# Altium PCB PCB4.PcbDoc
Units mil, origin at the board's own origin, x right, y up, seen from the top; angles counter-clockwise.
Board outline 1415 x 2590 mil, 2 copper layers (Top Layer, Bottom Layer); 19 components, 11 nets, 40 pads, 0 vias.
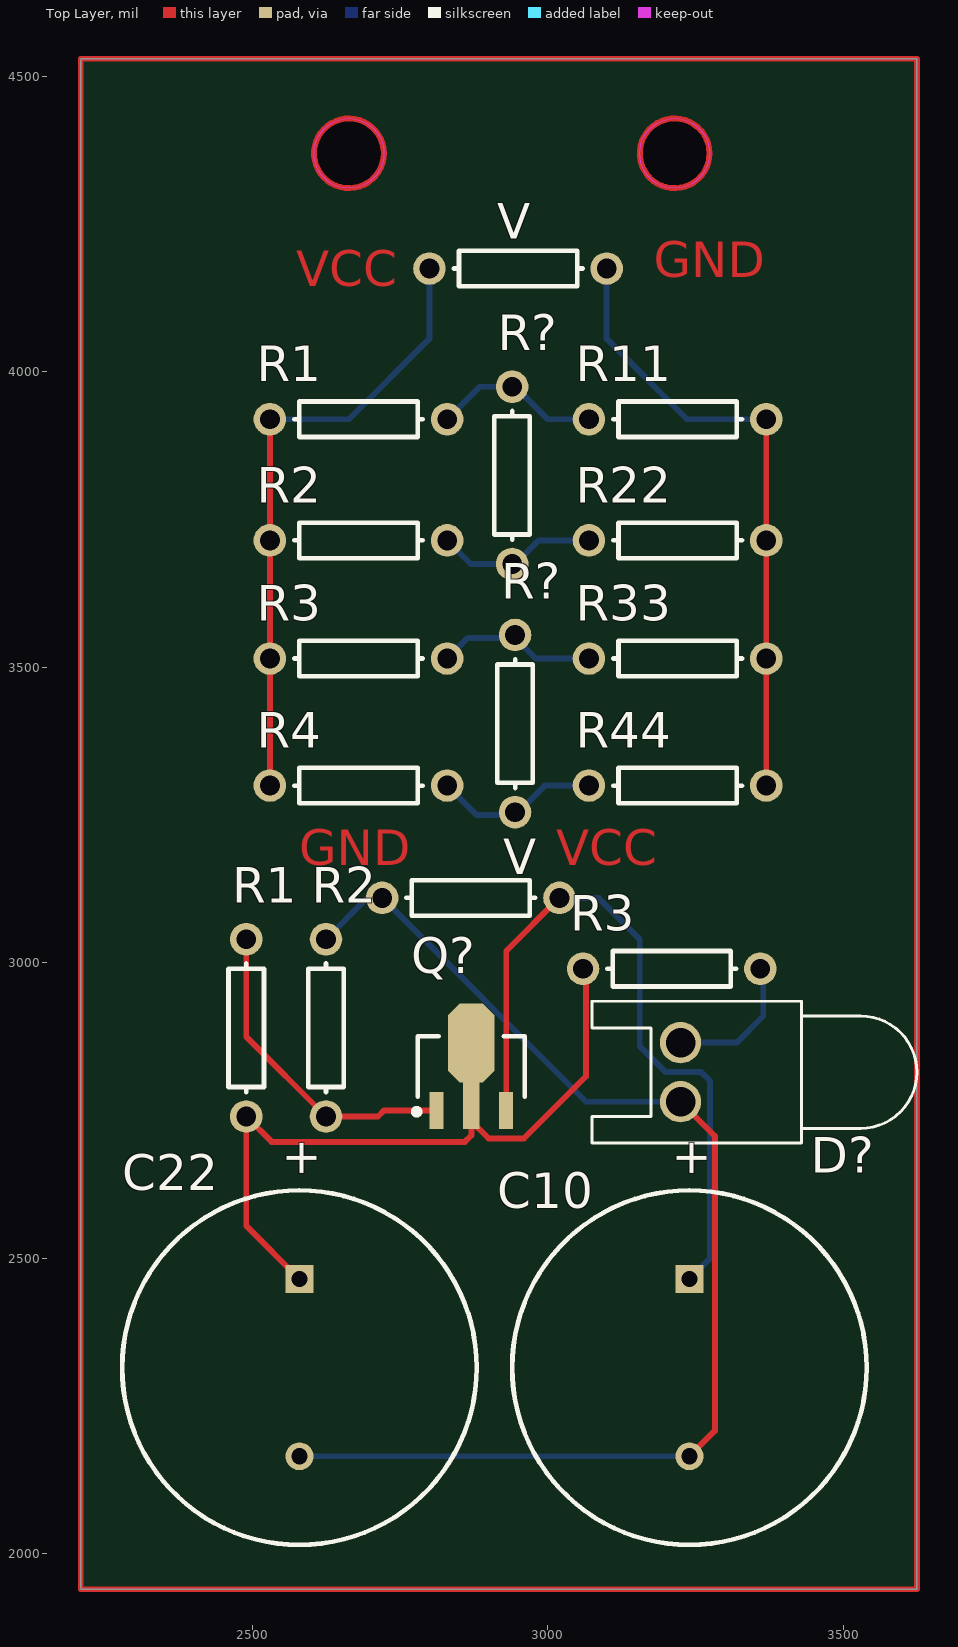
[diagram p0: Top Layer view]
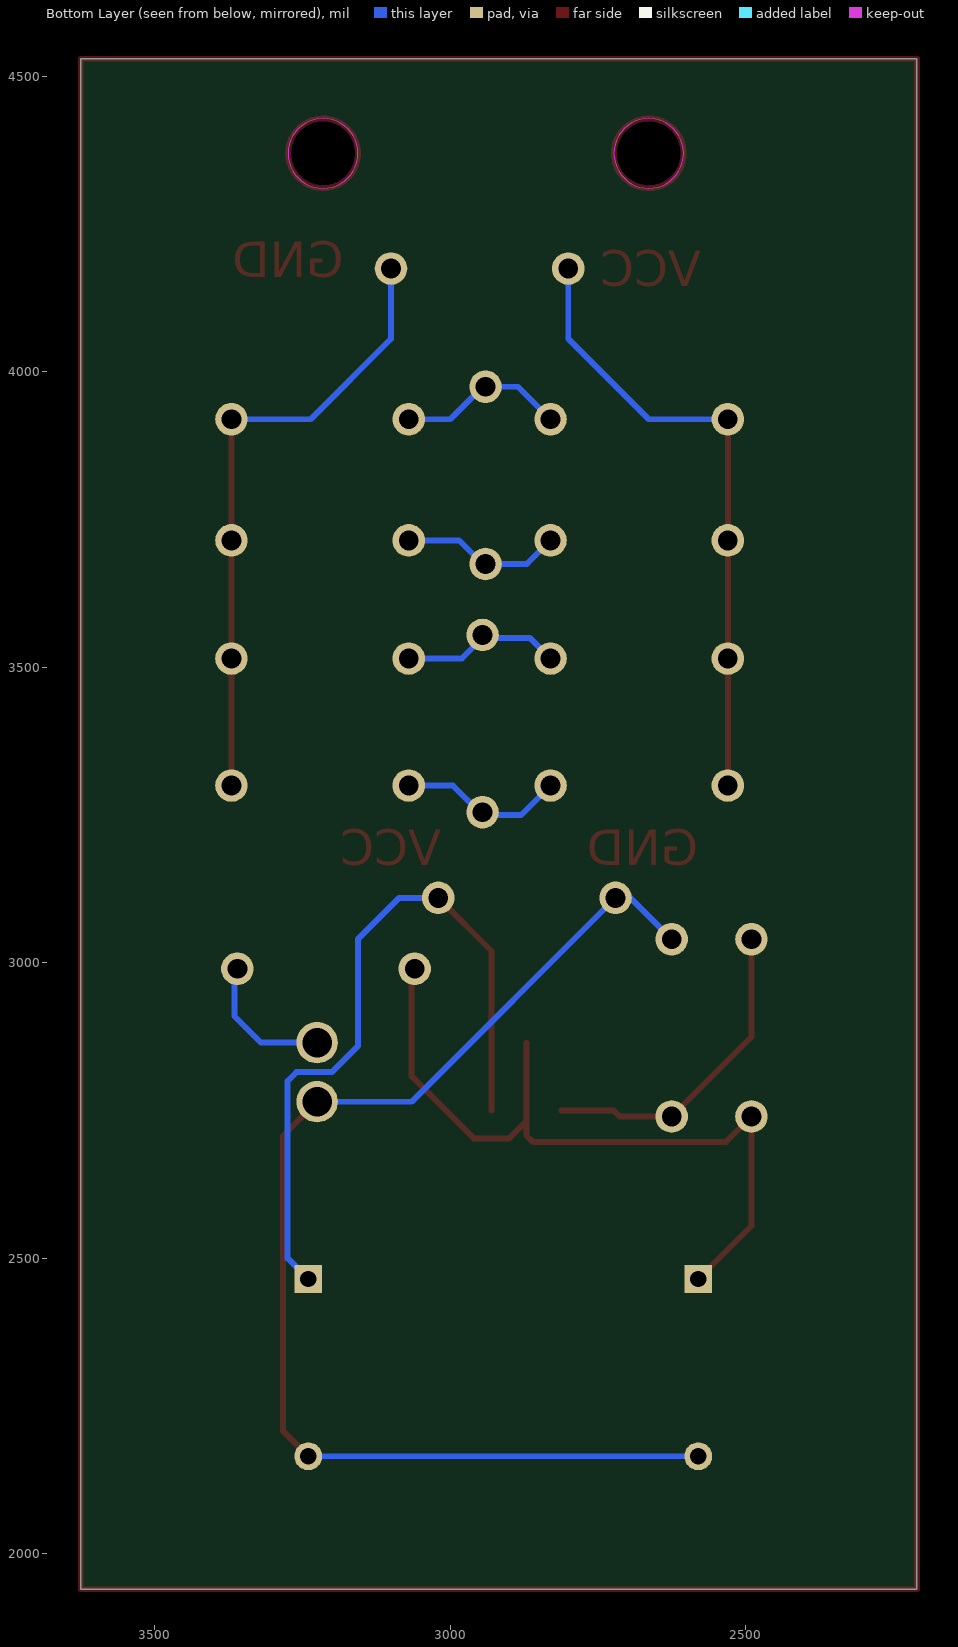
[diagram p1: Bottom Layer view, seen from below]

## Layer stack, top to bottom
Top Solder: solder mask 0.4, Solder Resist, Dk 3.5
Top Layer: signal copper 1.4
Dielectric 1: dielectric 12.6, FR-4, Dk 4.8
Bottom Layer: signal copper 1.4
Bottom Solder: solder mask 0.4, Solder Resist, Dk 3.5

## Board outline
2210,1940 2210,4530 3625,4530 3625,1940
cut-out: 2722.87,4370 cw(c2663.82,4370) 2663.82,4310.95 cw(c2663.82,4370) 2604.77,4370 cw(c2663.82,4370) 2663.82,4429.05 cw(c2663.82,4370)
cut-out: 3274.05,4370 cw(c3215,4370) 3215,4310.95 cw(c3215,4370) 3155.95,4370 cw(c3215,4370) 3215,4429.05 cw(c3215,4370)

## Design rules (kind name [scope] priority, off if disabled: settings)
Clearance [All] p1: gap=10 ignorepadtopadclearanceinfootprint=FALSE except(0: Arc-Hole Track-Hole SMDPad-Hole THPad-Hole Via-Hole Fill-Hole Poly-Hole Region-Hole Text-Hole)
PolygonConnect [All] p1: connectstyle=Relief reliefconductorwidth=10 reliefentries=4 polygonreliefangle="90 Angle" airgapwidth=10
RoutingVias [All] p1: holewidth=28 width=50 viastyle="Through Hole" minholewidth=28 minwidth=50 maxholewidth=28 maxwidth=50
SolderMaskExpansion [All] p1: expansion=4 istentingtop=FALSE
Width [All] p1: maxlimit=10 minlimit=10 preferedwidth=10
30 further rules are at their usual default settings.

## Classes and differential pairs
component class Sheet2: C10 C22 D? Q? R2 R3 V
component class Sheet1: R2 R3 R4 R11 R22 R33 R44 R? V

## Components (designator, comment, footprint, x,y, rotation, side; value= is the part's Value field where it differs from the comment)
C10 "Cap Pol1" RB7.6-15 3240,2315 r90 top value=10uF
C22 "Cap Pol1" RB7.6-15 2580,2315 r90 top value=22uF
D? "LED0" LED-0 3225,2815 r90 top
Q? "Diac-PNP" SOT89M 2870.94,2824.8 r90 top
R1 "Res1" AXIAL-0.3 2680,3920 r0 top value=1K
R1 "Res1" AXIAL-0.3 2490,2890 r270 top value=1K
R2 "Res1" AXIAL-0.3 2680,3715 r0 top value=1K
R2 "Res1" AXIAL-0.3 2625,2890 r270 top value=1K
R3 "Res1" AXIAL-0.3 2680,3515 r0 top value=1K
R3 "Res1" AXIAL-0.3 3210,2990 r0 top value=1K
R4 "Res1" AXIAL-0.3 2680,3300 r0 top value=1K
R11 "Res1" AXIAL-0.3 3220,3920 r0 top value=1K
R22 "Res1" AXIAL-0.3 3220,3715 r0 top value=1K
R33 "Res1" AXIAL-0.3 3220,3515 r0 top value=1K
R44 "Res1" AXIAL-0.3 3220,3300 r0 top value=1K
R? "Res1" AXIAL-0.3 2945,3405 r90 top value=1K
R? "Res1" AXIAL-0.3 2940,3825 r90 top value=1K
V "Res1" AXIAL-0.3 2950,4175 r180 top value=1K
V "Res1" AXIAL-0.3 2870,3110 r180 top value=1K

## Footprints (in the part's own frame and the unit in brackets; to place one, negate y for a bottom-side part, rotate by r counter-clockwise, add the part's x,y. Pads: shape width x height; smd on the part's side, far side on the other; paste and mask are expansions set on the pad)
AXIAL-0.3 [mm] "Axial Device, Thru-Hole; 2 Leads; 0.3 in Pin Spacing"
  round 1.4 hole 0.85: 1(-3.81,0) 2(3.81,0)
  silkscreen extent -2.77,-0.76 2.77,0.76
LED-0 [mil] "LED; 2 Leads"
  round 70 hole 50: 1(50,0) 2(-50,0)
  silkscreen extent -120,-400 120,150
RB7.6-15 [mm] "Polarized Capacitor (Radial); 2 Leads"
  rect 1.2x1.2 hole 0.7: 1(3.81,0)
  round 1.2 hole 0.7: 2(-3.81,0)
  silkscreen extent -7.62,-7.62 7.62,7.62
SOT89M [mm] "SOT89, 3-Leads, Body 4.5x2.4 mm, Pitch 1.5mm, Lead Span 4.1mm, IPC Low Density"
  rect 1.6x0.6 smd: 1(-1.9,1.5) 3(-1.9,-1.5)
  rect 2x0.7 smd: 2(-1.7,0)
  oct 3.4x2 smd: 2(1,0)
  silkscreen extent -2.07,-2.3 1.3,2.47, body extent -1.3,-2.3 1.3,2.3, height 1.6

## Part data
C10 C22: "Polarized Capacitor (Radial)", LatestRevisionDate=17-Jul-2002, LatestRevisionNote="Re-released for DXP Platform.", PackageDescription="Polarized Capacitor (Radial); 2 Leads", PackageReference=RB7.6-15, Published=8-Jun-2000, Publisher="Altium Limited"
D?: "Typical INFRARED GaAs LED", LatestRevisionDate=08-Jul-2005, LatestRevisionNote="Mech Layer 1 removed.", PackageDescription="LED; 2 Leads", PackageReference=LED-0, Published=8-Jun-2000, Publisher="Altium Limited"
Q?: "DIAC", Code_JEDEC=TO-243-AA, LatestRevisionDate=29-May-2009, LatestRevisionNote="IPC-7351 Footprint Added.", PackageDescription="3-Pin SOT-89 Package 1.5 mm Pitch, 4.1 mm Lead Span", PackageReference=SOT89, PackageVersion=Jul-2004, Published=24-Mar-1999, Publisher="Altium Limited"
R1 R1 R2 R2 R3 R3 R4 R11 R22 R33 R44 R? R? V V: "Resistor", LatestRevisionDate=17-Jul-2002, LatestRevisionNote="Re-released for DXP Platform.", PackageDescription="Axial Device, Thru-Hole; 2 Leads; 0.3 in Pin Spacing", PackageReference=AXIAL-0.3, Published=8-Jun-2000, Publisher="Altium Limited"

## Nets (pads, with @x,y where several pads share a name; then routed paths per layer and width w, separated by ;. In a path a pad name is that pad's centre, name@x,y a point inside that pad or via, vN(x,y) a via of type N, cw(c..) or ccw(c..) an arc to the next point about the centre after c; other vN are vias at no path point)
NetC10_1: C10.1 Q?.3 V.1@3020,3110 | length 1236.2
  Top Layer w10: Q?.3 2930,3020 V.1@3020,3110
  Bottom Layer w10: V.1@3020,3110 3086,3110 3156,3040 3156,2859 3200,2815 3260,2815 3275,2800 3275,2500 C10.1
NetC10_2: C10.2 C22.2 D?.2 R2.1@2625,3040 V.2@2720,3110 | length 2073.7
  Top Layer w10: D?.2 3283,2707 3283,2208 C10.2
  Bottom Layer w10: C22.2 C10.2 ; R2.1@2625,3040 2695,3110 2720,3110 3065,2765 D?.2
NetC22_1: C22.1 Q?.2 R1.2@2490,2740 R3.1@3060,2990 | length 1313.4
  Top Layer w10: C22.1 2490,2555 2490,2740 2533,2697 2860,2697 2870.94,2707.94 Q?.2@2870.94,2732.06 ; Q?.2@2870.94,2864.17 2870.94,2811 2870.94,2757.87 Q?.2@2870.94,2732.06 ; R3.1@3065,3000 3065,2808 2960,2703 2900,2703 Q?.2@2870.94,2732.06
NetD?_1: D?.1 R3.2@3360,2990 | length 248.6
  Bottom Layer w10: D?.1 3320,2865 3365,2910 R3.2@3365,3000
NetQ?_1: Q?.1 R1.1@2490,3040 R2.2@2625,2740 | length 547
  Top Layer w10: R1.1@2490,3040 2490,2875 2625,2740 2713,2740 2723,2750 Q?.1
NetR1_1: R1.1@2530,3920 R2.1@2530,3715 R3.1@2530,3515 R4.1 V.2@2800,4175 | length 1065.3
  Top Layer w10: R4.1 2530,3515 2530,3715 R1.1@2530,3920
  Bottom Layer w10: R1.1@2530,3920 2664,3920 2800,4056 V.2@2800,4175
NetR1_2: R1.2@2830,3920 R11.1 R?.2@2940,3975 | length 285.6
  Bottom Layer w10: R1.2@2830,3920 2885,3975 2945,3975 3000,3920 R11.1
NetR2_2: R2.2@2830,3715 R22.1 R?.1@2940,3675 | length 273.1
  Bottom Layer w10: R2.2@2830,3715 2870,3675 2945,3675 2985,3715 R22.1
NetR3_2: R3.2@2830,3515 R33.1 R?.2@2945,3555 | length 269
  Bottom Layer w10: R3.2@2830,3515 2865,3550 2945,3550 2980,3515 R33.1
NetR4_2: R4.2 R44.1 R?.1@2945,3255 | length 281.4
  Bottom Layer w10: R4.2 2880,3250 2945,3250 2995,3300 R44.1
NetR11_2: R11.2 R22.2 R33.2 R44.2 V.1@3100,4175 | length 1065.3
  Top Layer w10: R44.2 R33.2 R22.2 R11.2
  Bottom Layer w10: V.1@3100,4175 3100,4056 3236,3920 R11.2
copper on no net: | length 8752
  Top Layer w10: 2210,1940 3625,1940 3625,4530 2210,4530 2210,1940 ; 2722.87,4370 ccw(c2663.82,4370) 2722.87,4370 ; 3274.05,4370 ccw(c3215,4370) 3274.05,4370

## Other copper
Top Layer:
  text "GND" at 3180,4160 h60
  text "VCC" at 2575,4145 h60
  text "GND" at 2580,3165 h60
  text "VCC" at 3015,3165 h60

## Text inside footprints (layer, text, board x,y; h text height)
C10: Top Overlay "+" at 3269.01,2635.15 h59.06 r90
C22: Top Overlay "+" at 2609.01,2635.15 h59.06 r90